# Altium PCB pcb1.PcbDoc
Units mm, origin at the board's own origin, x right, y up, seen from the top; angles counter-clockwise.
Board outline 63 x 30 mm, 2 copper layers (Top Layer, Bottom Layer), stack 1.671 mm thick; 28 components, 26 nets, 77 pads, 7 vias.
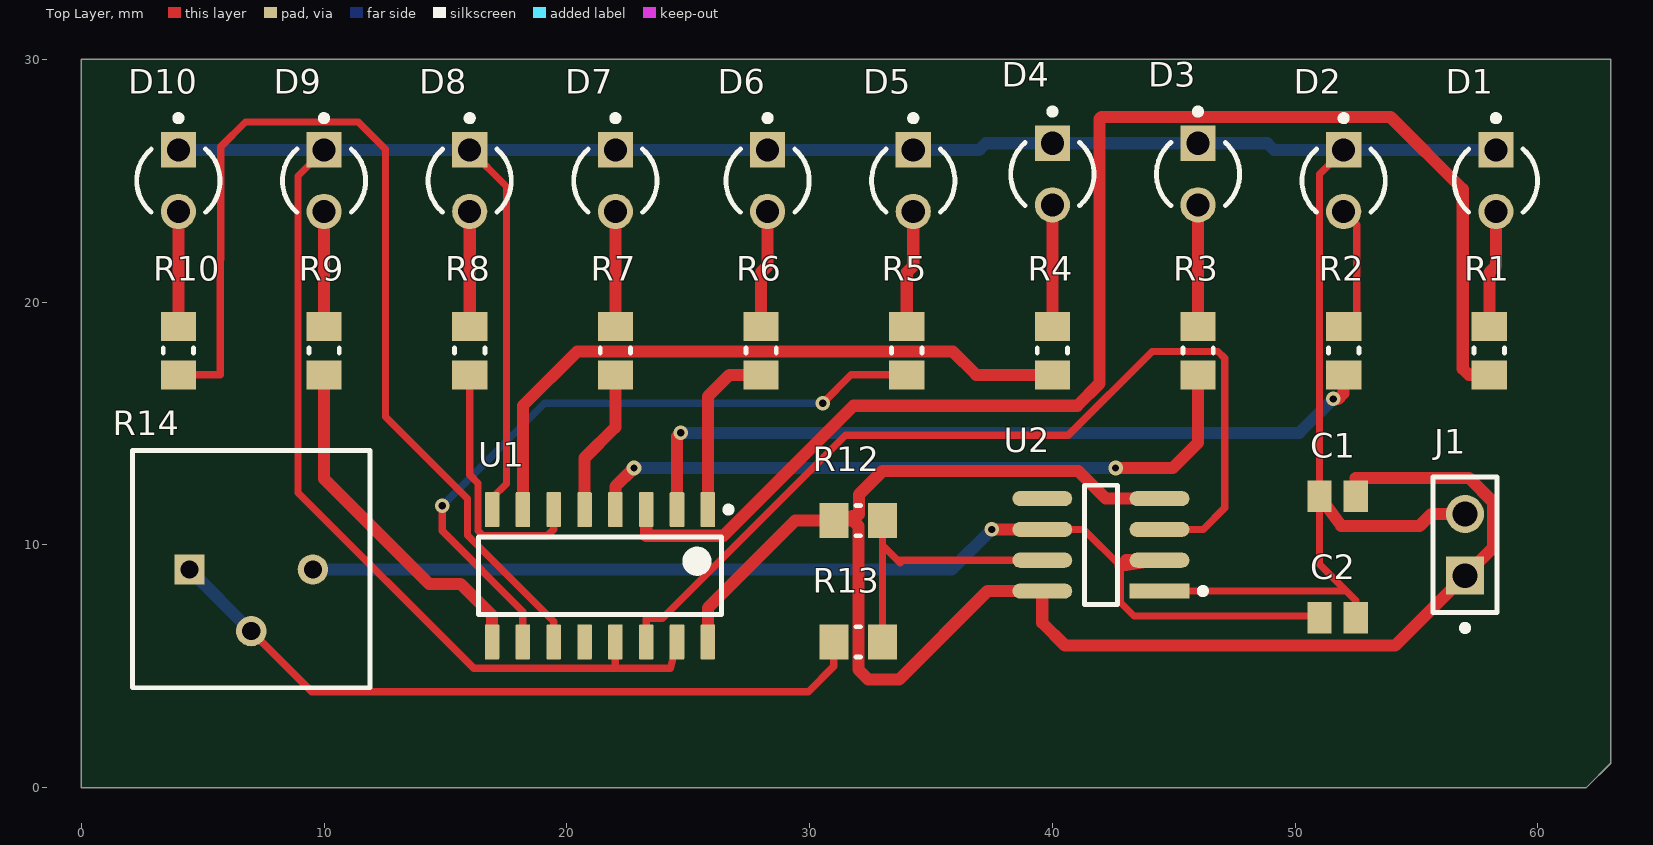
[diagram p0: Top Layer view]
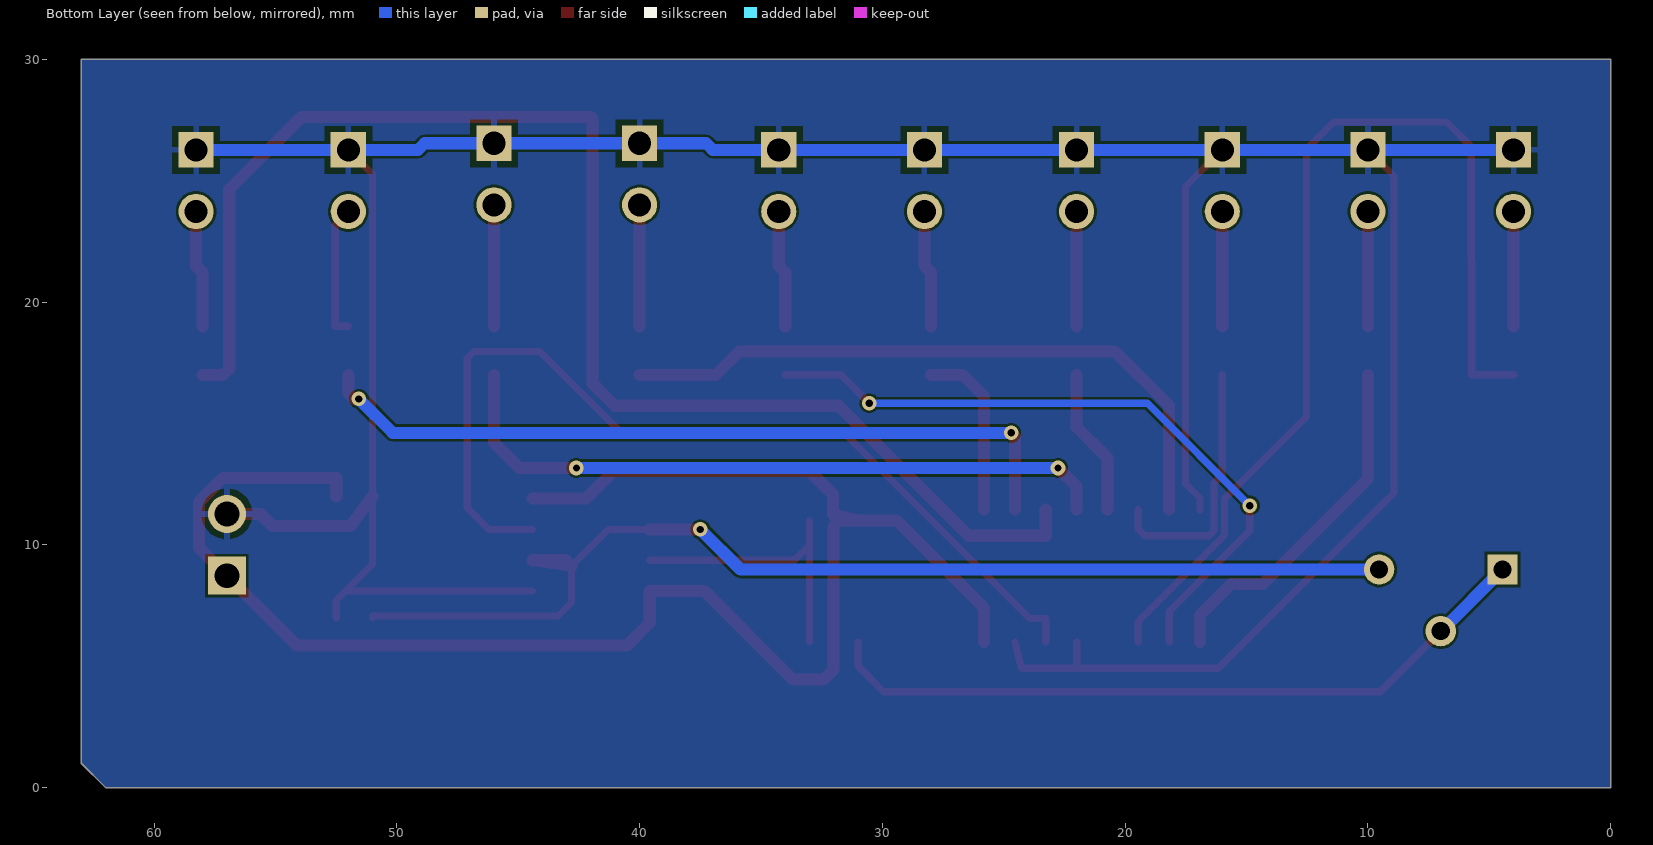
[diagram p1: Bottom Layer view, seen from below]
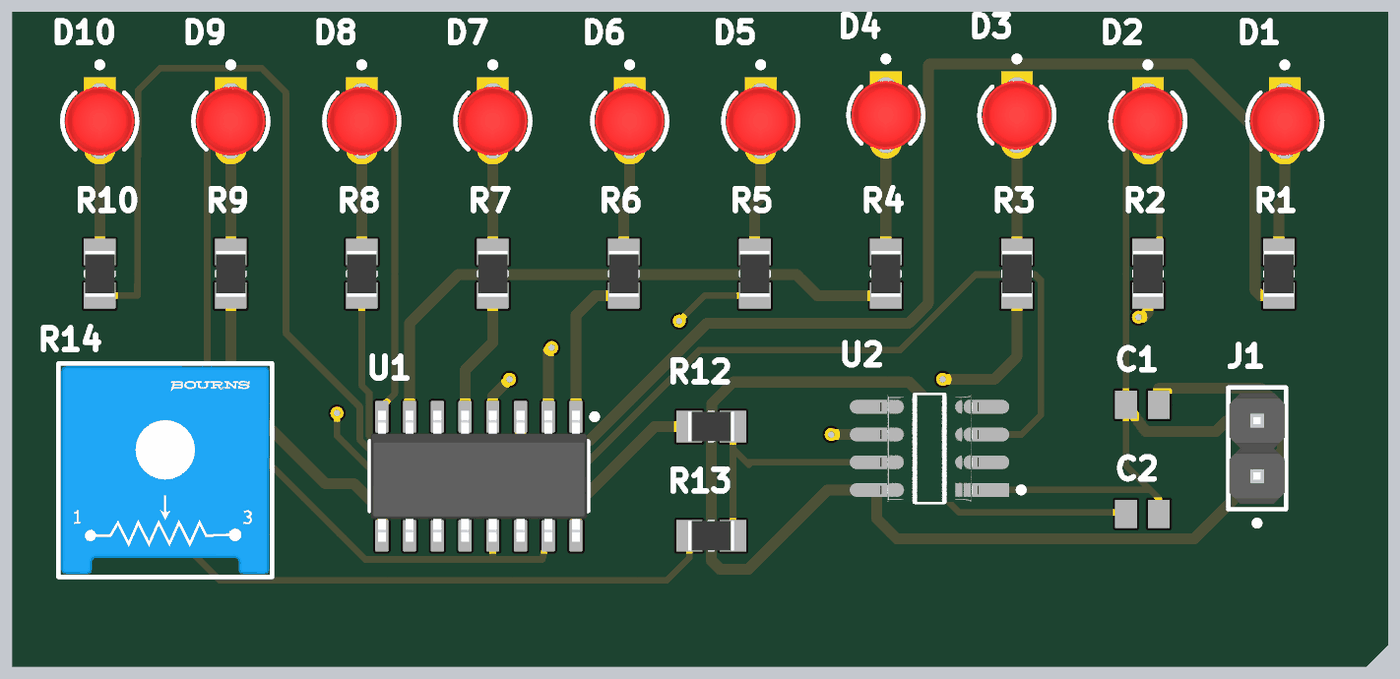
[diagram p2: 3D render of the assembled board from above, using the file's embedded part models]

## Layer stack, top to bottom
Top Solder: solder mask 0.0102, Solder Resist, Dk 3.5
Top Layer: signal copper 0.0356
Dielectric 1: dielectric 1.6, FR-4, Dk 4.8
Bottom Layer: signal copper 0.0356
Bottom Solder: solder mask 0.0102, Solder Resist, Dk 3.5

## Board outline
0,0 62,0 63,1 63,30 0,30

## Design rules (kind name [scope] priority, off if disabled: settings)
Clearance [All] p1: gap=0.1 ignorepadtopadclearanceinfootprint=FALSE
PolygonConnect [All] p1: connectstyle=Relief reliefconductorwidth=0.254 reliefentries=4 polygonreliefangle="90 Angle" airgapwidth=0.254
RoutingVias [All] p1: holewidth=0.3 width=0.6 viastyle="Through Hole" minholewidth=0.3 minwidth=0.6 maxholewidth=0.3 maxwidth=0.6
SilkToSolderMaskClearance [IsPad] p1: minsilkscreentomaskgap=0.1 clearancetoexposedcopper=TRUE
SolderMaskExpansion [All] p1: expansion=0.102 istentingtop=FALSE
SupplyNets "Schematic Supply Nets_1" [InNet('VCC')] p1: voltage=0.000
SupplyNets "Schematic Supply Nets" [InNet('GND')] p2: voltage=0.000
UnRoutedNet [All] p1: checkbadconnections=TRUE
Width [All] p1: maxlimit=0.3 minlimit=0.3 preferedwidth=0.3
28 further rules are at their usual default settings.

## Components (designator, comment, footprint, x,y, rotation, side; value= is the part's Value field where it differs from the comment)
C1 "1uF" CAPC2013X135X45LL10T25 51.75,12 r180 top
C2 "1uF" CAPC2013X135X45LL10T25 51.75,7 r0 top
D1 "HLMP-1301" FP-HLMP-1301-MFG 58.27,25 r270 top
D2 "HLMP-1301" FP-HLMP-1301-MFG 52,25 r270 top
D3 "HLMP-1301" FP-HLMP-1301-MFG 46,25.27 r270 top
D4 "HLMP-1301" FP-HLMP-1301-MFG 40,25.27 r270 top
D5 "HLMP-1301" FP-HLMP-1301-MFG 34.27,25 r270 top
D6 "HLMP-1301" FP-HLMP-1301-MFG 28.27,25 r270 top
D7 "HLMP-1301" FP-HLMP-1301-MFG 22,25 r270 top
D8 "HLMP-1301" FP-HLMP-1301-MFG 16,25 r270 top
D9 "HLMP-1301" FP-HLMP-1301-MFG 10,25 r270 top
D10 "HLMP-1301" FP-HLMP-1301-MFG 4,25 r270 top
J1 "M20-9990246" FP-M20-9990246-MFG 57,10 r90 top
R1 "RC0805FR-071KL" RESC2013X60X35ML10T20 58,18 r90 top
R2 "RC0805FR-071KL" RESC2013X60X35ML10T20 52,18 r90 top
R3 "RC0805FR-071KL" RESC2013X60X35ML10T20 46,18 r90 top
R4 "RC0805FR-071KL" RESC2013X60X35ML10T20 40,18 r90 top
R5 "RC0805FR-071KL" RESC2013X60X35ML10T20 34,18 r90 top
R6 "RC0805FR-071KL" RESC2013X60X35ML10T20 28,18 r90 top
R7 "RC0805FR-071KL" RESC2013X60X35ML10T20 22,18 r90 top
R8 "RC0805FR-071KL" RESC2013X60X35ML10T20 16,18 r90 top
R9 "RC0805FR-071KL" RESC2013X60X35ML10T20 10,18 r90 top
R10 "RC0805FR-071KL" RESC2013X60X35ML10T20 4,18 r90 top
R12 "2k2" RESC2013X60X35ML10T20 32,11 r180 top
R13 "10k" RESC2013X60X35ML10T20 32,6 r0 top
R14 "50k" FP-3386P-MFG 7,9 r0 top
U1 "CD4017BM" D0016A_N 21.365,8.725 r270 top
U2 "NE555DR" FP-D0008A-IPC_A 42,10 r180 top

## Footprints (in the part's own frame and the unit in brackets; to place one, negate y for a bottom-side part, rotate by r counter-clockwise, add the part's x,y. Pads: shape width x height; smd on the part's side, far side on the other; paste and mask are expansions set on the pad)
CAPC2013X135X45LL10T25 [mm] "Chip Capacitor, 2-Leads, Body 2.00x1.25mm, IPC High Density"
  rect 1x1.3 smd: 1(-0.75,0) 2(0.75,0)
  body extent -1.05,-0.67 1.05,0.68, height 1.35
D0016A_N [mm] "SOIC, 16-Leads, Body 10x4mm, Pitch 1.27mm, IPC Medium Density"
  rrect17% 1.45x0.6 smd: 1(-2.725,4.445) 2(-2.725,3.175) 3(-2.725,1.905) 4(-2.725,0.635) 5(-2.725,-0.635) 6(-2.725,-1.905) 7(-2.725,-3.175) 8(-2.725,-4.445) 9(2.725,-4.445) 10(2.725,-3.175) 11(2.725,-1.905) 12(2.725,-0.635) 13(2.725,0.635) 14(2.725,1.905) 15(2.725,3.175) 16(2.725,4.445)
  silkscreen extent -2.85,-5 1.6,5.42, body extent -3,-4.95 3,4.95, height 1.59
FP-3386P-MFG [mm]
  rect 1.25x1.25 hole 0.75 paste-2539.97 mask+0: 1(-2.54,-0.015)
  round 1.25 hole 0.75 paste-2539.97 mask+0: 2(0,-2.555) 3(2.54,-0.015)
  silkscreen extent -4.89,-4.89 4.89,4.89, body extent -4.99,-4.99 4.99,4.99, height 0.25
FP-D0008A-IPC_A [mm]
  rect 2.469x0.622 smd paste+0 mask+0: 1(-2.414,1.905)
  rrect100% 2.469x0.622 smd paste+0 mask+0: 2(-2.414,0.635) 3(-2.414,-0.635) 4(-2.414,-1.905) 5(2.414,-1.905) 6(2.414,-0.635) 7(2.414,0.635) 8(2.414,1.905)
  silkscreen extent -4.32,-2.45 0.68,2.45, body extent -4.15,-2.95 4.15,2.95, height 0.25
FP-HLMP-1301-MFG [mm]
  rect 1.45x1.45 hole 0.95 paste-2539.97 mask+0: 1(-1.27,0)
  round 1.45 hole 0.95 paste-2539.97 mask+0: 2(1.27,0)
  silkscreen extent -2.7,-1.71 1.3,1.71, body extent -2.22,-2.22 2.22,2.22, height 0.25
FP-M20-9990246-MFG [mm]
  rect 1.57x1.57 hole 1.02 paste-2539.97 mask+0: 1(-1.27,0)
  round 1.57 hole 1.02 paste-2539.97 mask+0: 2(1.27,0)
  silkscreen extent -3.55,-1.32 2.79,1.32, body extent -2.89,-1.42 2.89,1.42, height 0.25
RESC2013X60X35ML10T20 [mm] "Chip Resistor, 2-Leads, Body 2.1x1.35mm, IPC Low Density"
  rect 1.2x1.45 smd: 1(-1,0) 2(1,0)
  silkscreen extent -0.1,-0.62 0.1,0.62, body extent -1.05,-0.68 1.05,0.67, height 0.6

## Part data
C1 C2: library part CMP-1036-04761-2, Manufacturer=Murata, Part Number=GRM21BR71H105KA12L
D1 D2 D3 D4 D5 D6 D7 D8 D9 D10: library part CMP-18399-000007-1, "LED RED DIFFUSED T-1 T/H", Colour=Red, Forward Current=10mA, Forward Voltage=1.9V, Manufacturer=Broadcom, Max Junction Temp=+110°C, Package=0, Reverse Voltage=5V, Temperature="-40°C to +100°C", Temperature Range High=+100°C, Temperature Range Low=-40°C, Automotive=No, Category=Diode, ComponentLink2Description=Datasheet, ComponentLink2URL=https://docs.broadcom.com/docs/AV02-1555EN, Device Class L1=Optoelectronics, Device Class L2=LEDs, Device Class L3=unset, Digikey Description="LED RED DIFFUSED T-1 T/H", Lead Free=Yes, Led Orientation=Straight, Luminous Intensity=3.4mcd, Manufacturer Part Number=HLMP-1301, Mouser Description="Standard LEDs - Through Hole Red Diffused 635nm 3.4mcd", Octopart=https://octopart.com/hlmp-1301-broadcom-71130345, Peak Emmision Wavelength=635nm, RoHS=TRUE, Viewing Angle=60°, Wavelength=626nm
J1: library part CMP-15831-000009-1, "CONN HEADER VERT 2POS 2.54MM", Current Rating=3A, Manufacturer=Harwin, Temperature="-40°C to +105°C", Temperature Range High=+105°C, Temperature Range Low=-40°C, Automotive=No, Category=Conn, ComponentLink2Description=Datasheet, ComponentLink2URL=https://cdn.harwin.com/pdfs/M20-999.pdf, Conn Gender=Male, Conn Orientation=Vertical, Contact Material=Tin,Nickel, Device Class L1=Connectors, Device Class L2="Headers and Wire Housings", Device Class L3=unset, Digikey Description="CONN HEADER VERT 2POS 2.54MM", Height=8.99mm, Lead Free=Yes, Manufacturer Part Number=M20-9990246, Mouser Description="2.54mm (0.1\") Pitch SIL Vertical PC Tail Pin Header, 6.1mm mating pin height, tin, 2 contacts", Number Of Contacts=2, Number Of Rows=1, Octopart=https://octopart.com/m20-9990246-harwin-2590635, Package=M20-9990246, Pitch=2.54mm, RoHS=TRUE
R1 R2 R3 R4 R5 R6 R7 R8 R9 R10 R12 R13: library part CMP-2100-03671-1, "Chip Resistor, 1 KOhm, +/- 1%, 125 mW, -55 to 155 degC, 0805 (2012 Metric), RoHS, Tape and Reel", Case Code (Imperial)=0805, Case Code (Metric)=2012, Manufacturer=Yageo, Max Operating Temperature=155degC, Max Power Dissipation=125mW, Min Operating Temperature=-55degC, Package Description="2-Pin Surface Mounted Device, Body 2 x 1.25 mm", Package Quantity=1, Resistance=1KOhm, Temperature Coefficient=100ppm/degreesC, Tolerance=1%, Voltage Rating=150V, Case/Package=0805, Composition=ThickFilm, Datasheet URL=http://www.yageo.com/NewPortal/yageodocoutput?fileName=/pdf/R-Chip/PYu-RC_Group_51_RoHS_L_5.pdf, Datasheet Version="Rev. 5, 10/2016", Depth=1.25mm, Height=0.024inch, Lead Free=LeadFree, Length=0.079inch, Manufacturer URL=http://www.yageo.com/, Military Standard=Not, Number of Pins=2, Number of Terminations=2, Package Reference=0805, Packaging=TapeandReel, Power Rating=125mW, REACH SVHC=Unknown, RoHSCompliant=true, Termination=SMD/SMT, Voltage Rating (DC)=150V, Width=0.049inch
R14: library part CMP-2000-05592-8, "TRIMMER 100K OHM 0.5W PC PIN TOP", Color=Blue, Manufacturer Series=3386, Max Operating Temperature=125°C, Max Power Dissipation=500mW, Min Operating Temperature=-55°C, Package Quantity=100, Resistance=100kR, Resistance Law=Linear, Resistance Tolerance=10%, Resistor Type=Cermet, Temperature Coefficient=100ppm/°C, Voltage Rating=300V, Actuator Orientation=Vertical, Actuator Type=SCREW, Contact Plating=Tin, Depth=9.53mm, Height=4.83mm, Lead Free="Contains Lead", Length=9.53mm, Military Standard=Not, Mount="Through Hole", Number of Pins=3, Number of Terminals/Pins=3, Number of Turns=1, Packaging=Rail/Tube, Power Rating=500mW, Radiation Hardening=No, Reach SVHC Compliant=Yes, RoHS Compliant=Yes, Series="Trimpot® 3386 - Sealed", Taper=Linear, Technology=CERMET, Terminal Finish=Tin, Termination=Pin, Tolerance=10%, Type=Potentiometer, Weight=0.03oz, Width=9.53mm
U1: library part CMP-1623-00071-2, "CMOS Decade Counter with 10 Decoded Outputs, D0016A, TUBE", F @ Nom Voltage(Max)(Mhz)=8, Generic Part Number=CD4017B, ICC @ Nom Voltage(Max)(mA)=0.03, Manufacturer="Texas Instruments", Operating Temperature Range(C)="-55 to 125", Rating=Military, tpd @ Nom Voltage(Max)(ns)=270, Voltage(Nom)(V)=10, Bits(#)=10, Code_JEDEC="MS-012 variation AC", DatasheetVersion=SCHS027C, Function=Counter, Input Type=CMOS, Inputs=1, Output Drive (IOL/IOH)(Max)(mA)=1.5/-1.5, Output Type=CMOS, PackageReference=D0016A, Schmitt Trigger=No, Technology Family=CD4000, Type=Decade, VCC(Max)(V)=18, VCC(Min)(V)=3
U2: library part CMP-1685-00007-2, "IC OSC SGL TIMER 100KHZ 8-SOIC", Case/Package=SOIC, Frequency=100kHz, High Level Output Current=-200mA, Low Level Output Current=200mA, Max Operating Temperature=70°C, Max Supply Voltage=16V, Min Operating Temperature=0°C, Min Supply Voltage=4.5V, Operating Supply Current=10mA, Package Quantity=2500, Quiescent Current=15mA, Contact Plating=Gold, Height=1.58mm, Lead Free="Lead Free", Length=4.9mm, Mount="Surface Mount", Number of Pins=8, Number of Timers/Counters=1, Packaging="Tape and Reel", Radiation Hardening=No, REACH SVHC="No SVHC", Weight=0.002561oz, Width=3.91mm

## Via types
v1: diameter 0.6, hole 0.3, Top Layer to Bottom Layer, 7 vias

## Nets (pads, with @x,y where several pads share a name; then routed paths per layer and width w, separated by ;. In a path a pad name is that pad's centre, name@x,y a point inside that pad or via, vN(x,y) a via of type N, cw(c..) or ccw(c..) an arc to the next point about the centre after c; other vN are vias at no path point)
GND: C1.2 C2.2 D1.1 D2.1 D3.1 D4.1 D5.1 D6.1 D7.1 D8.1 D9.1 D10.1 J1.2 U1.8 U1.13 U1.15 U2.1 | length 140.1
  Top Layer w0.3: D9.1 8.924,25.194 8.924,12.149 16.163,4.91 22,4.91 ; D8.1 17.515,24.755 17.515,12.52 16.92,11.925 U1.8 ; U1.13 22,4.91 ; U1.15 24.266,4.91 22,4.91 ; U2.1 52.109,8.095 ; D2.1 51,25.27 C1.2 51,9.204 52.109,8.095 ; C2.2 52.5,7.704 52.109,8.095
  Top Layer w0.5: C1.2 51.901,10.777 55.127,10.777 55.619,11.27 J1.2
  Bottom Layer w0.5: D10.1 D9.1 D8.1 D7.1 D6.1 D5.1 36.991,26.27 37.261,26.54 D4.1 D3.1 48.853,26.54 49.123,26.27 D2.1 D1.1
NetC2_1: C2.1 R14.3 U2.2 U2.6 | length 47.9
  Top Layer w0.3: U2.6 41.299,10.635 42.808,9.126 42.808,7.628 43.366,7.069 51,7.069 C2.1
  Top Layer w0.5: v1(37.499,10.635) U2.6 ; 42.808,9.126 43.046,9.365 U2.2 42.808,9.126
  Bottom Layer w0.5: R14.3 35.849,8.985 v1(37.499,10.635)
NetD1_2: D1.2 R1.2 | length 4.8
  Top Layer w0.5: R1.2 58,21.217 58.27,21.487 D1.2
NetD2_2: D2.2 R2.2 | length 5.5
  Top Layer w0.3: R2.2 52.538,19 52.538,23.192 D2.2
NetD3_2: D3.2 R3.2 | length 5
  Top Layer w0.5: R3.2 D3.2
NetD4_2: D4.2 R4.2 | length 5
  Top Layer w0.5: R4.2 D4.2
NetD5_2: D5.2 R5.2 | length 4.8
  Top Layer w0.5: R5.2 34,21.217 34.27,21.487 D5.2
NetD6_2: D6.2 R6.2 | length 4.8
  Top Layer w0.5: R6.2 28,21.217 28.27,21.487 D6.2
NetD7_2: D7.2 R7.2 | length 4.7
  Top Layer w0.5: R7.2 D7.2
NetD8_2: D8.2 R8.2 | length 4.7
  Top Layer w0.5: R8.2 D8.2
NetD9_2: D9.2 R9.2 | length 4.7
  Top Layer w0.5: R9.2 D9.2
NetD10_2: D10.2 R10.2 | length 4.7
  Top Layer w0.5: R10.2 D10.2
NetR1_1: R1.1 U1.3 | length 58.1
  Top Layer w0.5: U1.3 23.27,10.371 26.45,10.371 31.809,15.73 41.03,15.73 41.944,16.645 41.944,27.541 42.02,27.618 53.933,27.618 56.905,24.646 56.905,17.254 57.159,17 R1.1
NetR2_1: R2.1 U1.2 | length 32
  Top Layer w0.5: U1.2 24.54,14.455 v1(24.697,14.613) ; v1(51.571,16.01) 51.771,16.01 52,16.238 R2.1
  Bottom Layer w0.5: v1(24.697,14.613) 50.174,14.613 v1(51.571,16.01)
NetR3_1: R3.1 U1.4 | length 28.5
  Top Layer w0.5: U1.4 22,12.398 v1(22.767,13.165) ; v1(42.604,13.165) 44.959,13.165 46,14.206 R3.1
  Bottom Layer w0.5: v1(22.767,13.165) v1(42.604,13.165)
NetR4_1: R4.1 U1.7 | length 27.4
  Top Layer w0.5: U1.7 18.19,15.725 20.43,17.966 35.899,17.966 36.864,17 R4.1
NetR5_1: R5.1 U1.10 | length 28.4
  Top Layer w0.3: v1(14.866,11.614) 14.866,10.579 18.19,7.255 U1.10 ; v1(30.539,15.832) 31.707,17 R5.1
  Bottom Layer w0.3: v1(14.866,11.614) 19.084,15.832 v1(30.539,15.832)
NetR6_1: R6.1 U1.1 | length 7.2
  Top Layer w0.5: U1.1 25.81,16.106 26.704,17 R6.1
NetR7_1: R7.1 U1.5 | length 6.1
  Top Layer w0.5: U1.5 20.73,13.571 22,14.841 R7.1
NetR8_1: R8.1 U1.6 | length 10.7
  Top Layer w0.3: R8.1 16,12.88 16.341,12.539 16.341,10.574 16.544,10.371 19.186,10.371 19.46,10.645 U1.6
NetR9_1: R9.1 U1.9 | length 14.6
  Top Layer w0.5: R9.1 10,12.72 14.332,8.388 15.626,8.388 16.92,7.094 U1.9
NetR10_1: R10.1 U1.11 | length 42
  Top Layer w0.3: R10.1 5.724,17 5.749,26.398 6.765,27.414 11.413,27.414 12.531,26.297 12.531,15.277 15.913,11.895 15.913,10.392 19.46,6.845 U1.11
NetR12_1: R12.1 R13.2 U2.7 | length 12
  Top Layer w0.3: R13.2 33,9.978 ; R12.1 33,9.978 ; U2.7 33.731,9.365 33.731,9.247 33,9.978
NetR13_1: R13.1 R14.1 R14.2 | length 30.1
  Top Layer w0.3: R14.2 9.497,3.948 29.955,3.948 31,4.993 R13.1
  Bottom Layer w0.5: R14.1 4.46,8.979 6.994,6.445 R14.2
NetU1_14: U1.14 U2.3 | length 38.7
  Top Layer w0.3: U1.14 23.27,6.962 23.93,6.962 31.479,14.511 40.659,14.511 44.113,17.966 46.821,17.966 47.1,17.686 47.1,11.524 46.211,10.635 U2.3
VCC: C1.1 J1.1 R12.2 U1.16 U2.4 U2.8 | length 70.1
  Top Layer w0.5: U1.16 25.81,7.399 29.411,11 R12.2 ; U2.4 42.198,11.905 41.065,13.038 33.003,13.038 32.038,12.073 32.038,11.254 R12.2 ; C1.1 52.5,12.748 57.169,12.748 58.149,11.768 58.149,9.879 J1.1 54.12,5.85 40.522,5.85 39.586,6.785 U2.8 37.331,8.095 33.689,4.453 32.419,4.453 32.013,4.859 32.013,10.771 31.784,11 R12.2
pads on no net: U1.12 U2.5

## Polygon pours and split planes (outlines as drawn)
GND on Bottom Layer "GND_L02_P001" (solid, pour order 1): 0,0 62,0 63,1 63,30 0,30